# Altium PCB HumTemp_ESP32.PcbDoc
Units mm, origin at the board's own origin, x right, y up, seen from the top; angles counter-clockwise.
Board outline 66 x 92 mm, 2 copper layers (Top Layer, Bottom Layer); 12 components, 8 nets, 83 pads, 3 vias.
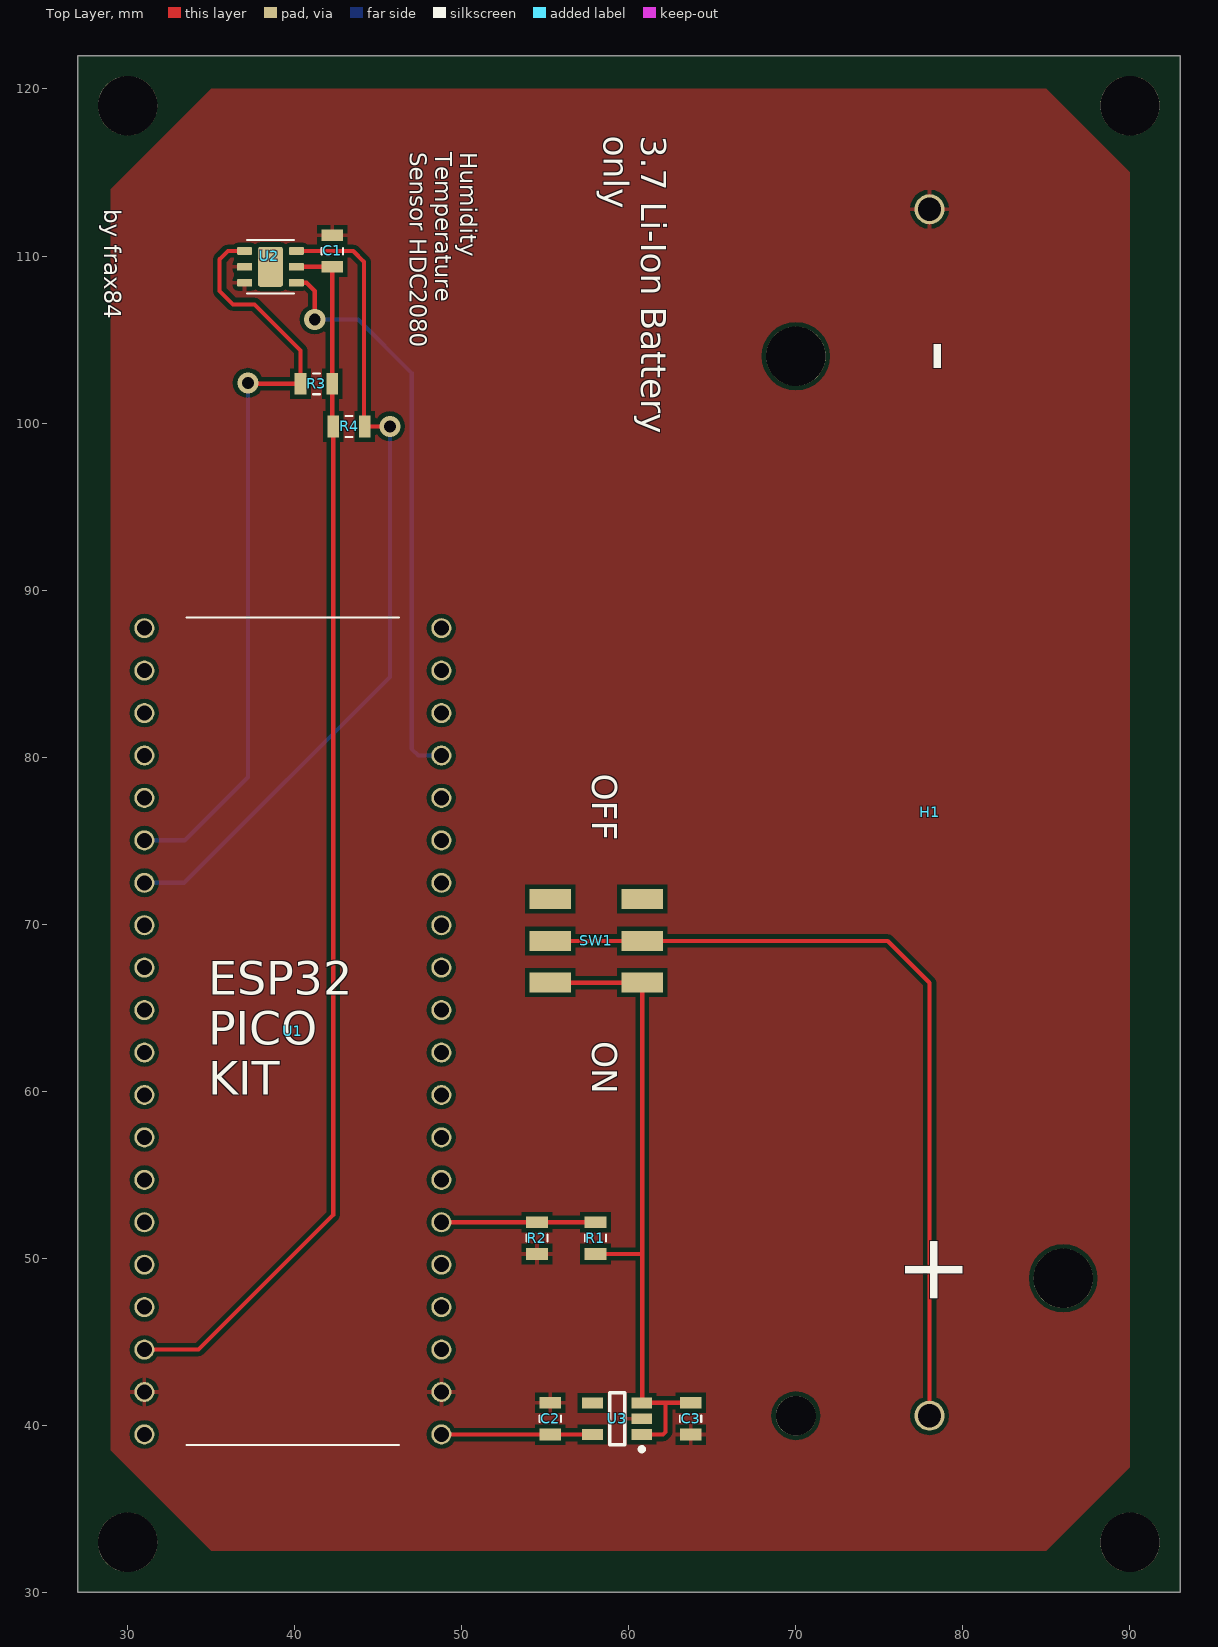
[diagram p0: Top Layer view]
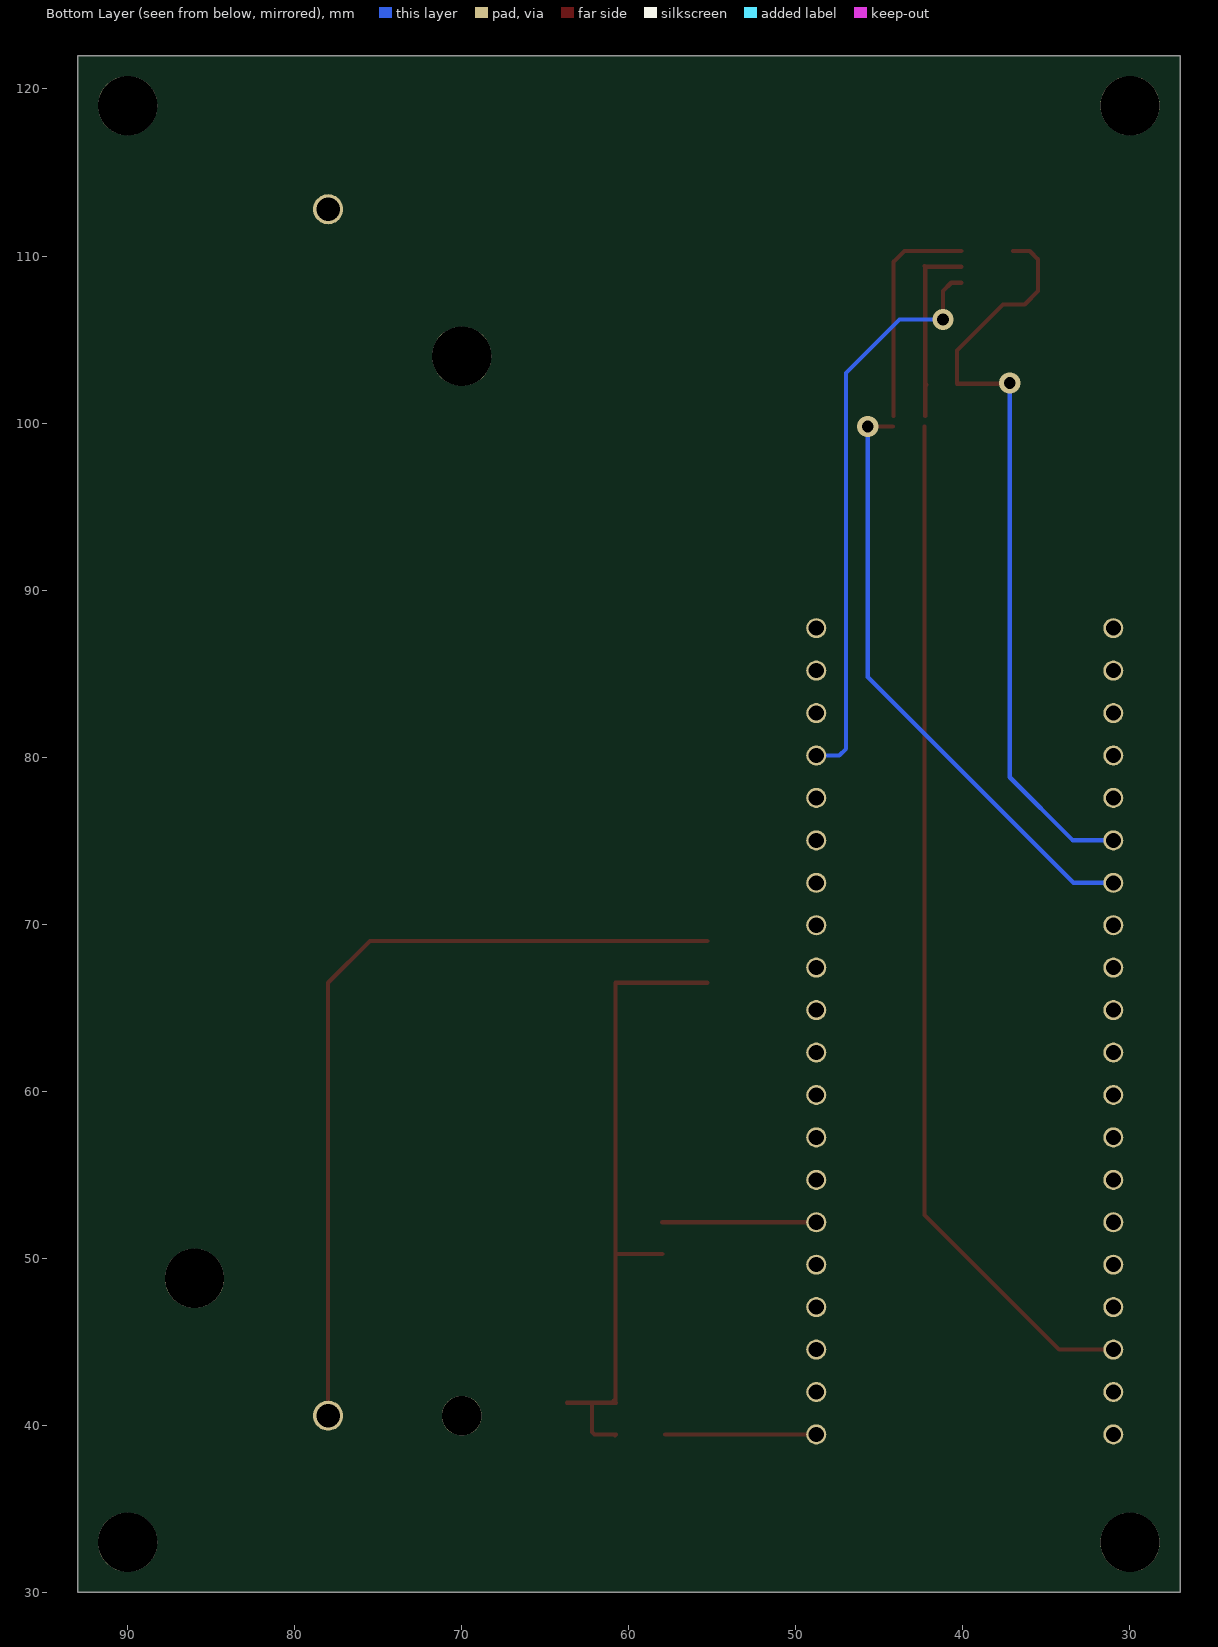
[diagram p1: Bottom Layer view, seen from below]
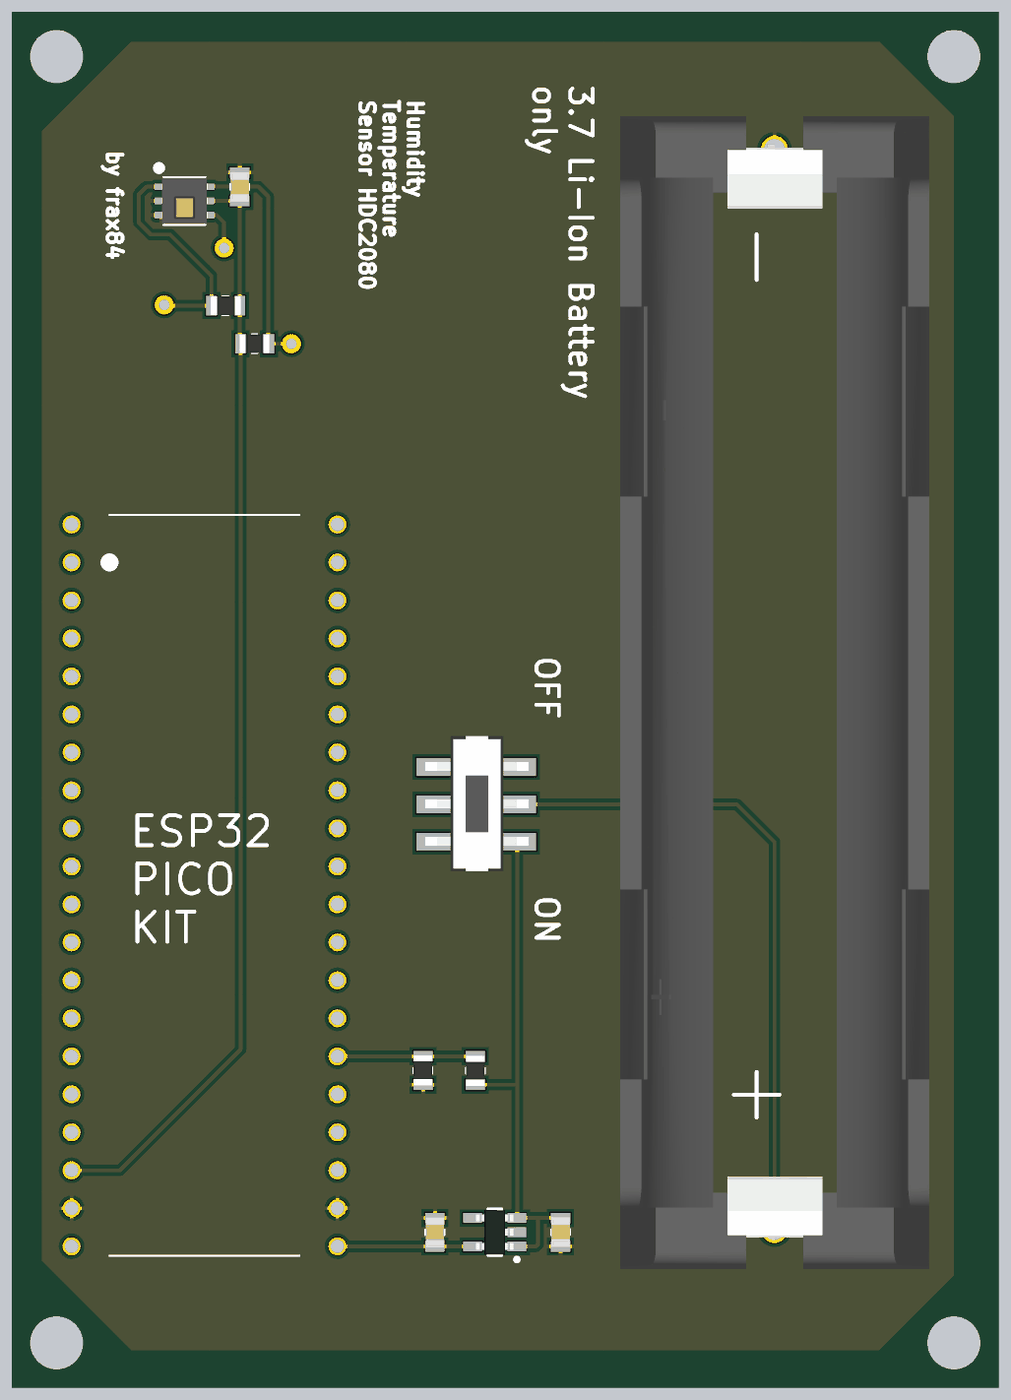
[diagram p2: 3D render of the assembled board from above, using the file's embedded part models]

## Layer stack, top to bottom
Top Solder: solder mask 0.0102, Solder Resist, Dk 3.5
Top Layer: signal copper 0.0356
Dielectric 1: dielectric 0.32, FR-4, Dk 4.8
Bottom Layer: signal copper 0.0356
Bottom Solder: solder mask 0.0102, Solder Resist, Dk 3.5

## Board outline
27,30 93,30 93,122 27,122

## Design rules (kind name [scope] priority, off if disabled: settings)
Clearance [All] p1: gap=0.254
HoleSize [All] p1: absolutevalues=TRUE maxlimit=5.08 minlimit=0.025 maxpercent=80.000 minpercent=20.000
MinimumSolderMaskSliver [All] p1: minsoldermaskwidth=0.127
PolygonConnect [All] p1: connectstyle=Relief reliefconductorwidth=0.254 reliefentries=4 polygonreliefangle="90 Angle" airgapwidth=0.254
RoutingVias [All] p1: holewidth=0.711 width=1.27 viastyle="Through Hole" minholewidth=0.711 minwidth=1.27 maxholewidth=0.711 maxwidth=1.27
SolderMaskExpansion [All] p1: expansion=0.102
Width [All] p1: maxlimit=0.254 minlimit=0.254 preferedwidth=0.254
28 further rules are at their usual default settings.

## Components (designator, comment, footprint, x,y, rotation, side; value= is the part's Value field where it differs from the comment)
C1 "SMD Capacitor" CAPCERAMIC_SMD_2012M_0805I 42.25,111.25 r270 top
C2 "SMD Capacitor" CAPCERAMIC_SMD_2012M_0805I 55.3,41.35 r270 top
C3 "SMD Capacitor" CAPCERAMIC_SMD_2012M_0805I 63.7,39.45 r90 top
H1 "18650 Battery holder - Keystone" 18650_BATTERYHOLDER 78,112.8 r270 top
R1 "SMD Resistor" RES_SMD_2012M-0805I 58,52.16 r270 top
R2 "SMD Resistor" RES_SMD_2012M-0805I 54.5,50.26 r90 top
R3 "SMD Resistor" RES_SMD_2012M-0805I 40.35,102.35 r0 top
R4 "SMD Resistor" RES_SMD_2012M-0805I 44.2,99.8 r180 top
SW1 "SwitchDPDT_JS202011SCQN" SWITCHDPDT 60.8,71.5 r270 top
U1 "ESP32-PICO-KIT" ESP32-PICO-KIT 31,87.72 r0 top
U2 "HDC2080" WSON6 37.15,110.35 r0 top
U3 "AP2112-3.3V" SOT95P285X110-5M 59.3,40.4 r180 top

## Footprints (in the part's own frame and the unit in brackets; to place one, negate y for a bottom-side part, rotate by r counter-clockwise, add the part's x,y. Pads: shape width x height; smd on the part's side, far side on the other; paste and mask are expansions set on the pad)
18650_BATTERYHOLDER [mm]
  round 1.8 hole 1.4 mask+0.07: 1(0,0) 2(72.22,0)
  round 3.55 hole 3.55 unplated paste+0 mask+0: ""(8.8,-8) ""(64,8)
  round 2.39 hole 2.39 unplated paste+0 mask+0: ""(72.22,-8)
  body extent -2.2,-10.3 74.85,10.35, height 14.86
CAPCERAMIC_SMD_2012M_0805I [mm] "2012 Metric - 0805 Imperial"
  rect 0.7x1.3 smd: 1(0,0) 2(1.9,0)
  silkscreen extent 0.76,-0.63 1.14,0.64, body extent -0.03,-0.62 1.97,0.63, height 0.59
ESP32-PICO-KIT [mm] "ESP32 Pico module development kit"
  round 1.2 hole 0.9 mask+0.07: 0(0,0) 1(0,-2.54) 2(0,-5.08) 4(0,-7.62) 5(0,-10.16) 6(0,-12.7) 7(0,-15.24) 8(0,-17.78) 9(0,-20.32) 10(0,-22.86) 11(0,-25.4) 12(0,-27.94) 13(0,-30.48) 14(0,-33.02) 15(0,-35.56) 16(0,-38.1) 17(0,-40.64) 18(0,-43.18) 19(0,-45.72) 20(0,-48.26) 21(17.78,0) 22(17.78,-2.54) 23(17.78,-5.08) 24(17.78,-7.62) 25(17.78,-10.16) 26(17.78,-12.7) 27(17.78,-15.24) 28(17.78,-17.78) 29(17.78,-20.32) 30(17.78,-22.86) 31(17.78,-25.4) 32(17.78,-27.94) 33(17.78,-30.48) 34(17.78,-33.02) 35(17.78,-35.56) 36(17.78,-38.1) 37(17.78,-40.64) 38(17.78,-43.18) 39(17.78,-45.72) 40(17.78,-48.26)
  round 1.2 on Top Overlay mask+0.07: ""(2.54,-2.54)
  silkscreen extent 2.54,-48.89 15.24,0.64
RES_SMD_2012M-0805I [mm] "2012 Metric - 0805 Imperial"
  rect 0.7x1.3 smd: 1(0,0) 2(1.9,0)
  silkscreen extent 0.75,-0.63 1.15,0.63, body extent -0.03,-0.62 1.97,0.63, height 0.6
SOT95P285X110-5M [mm] "SOT23, 5-Leads, Body 3,00x2,85mm, Pitch 0,95mm, IPC Low Density"
  rect 1.25x0.65 smd mask+0.07: 1(-1.475,0.95) 2(-1.475,0) 3(-1.475,-0.95)
  rect 1.25x0.65 smd: 4(1.475,-0.95) 5(1.475,0.95)
  silkscreen extent -1.6,-1.55 0.45,1.95, body extent -1.25,-1.5 1.25,1.5, height 1.07
SWITCHDPDT [mm]
  rect 1.2x2.5 smd: 0(0,0) 1(2.5,0) 2(5,0) 3(0,-5.5) 4(2.5,-5.5) 5(5,-5.5)
  body extent -2.06,-6.14 6.99,0.76, height 5.45
WSON6 [mm]
  rrect20% 0.9x0.45 smd mask+0.05: 1(-0.15,-0.05) 2(-0.15,-1) 3(-0.15,-1.95) 4(2.95,-1.95) 5(2.95,-1) 6(2.95,-0.05)
  round 0.8 on Top Overlay mask+0.07: 3(-0.3,1.2)
  rrect20% 1.5x2.4 smd mask+0.05: ""(1.4,-1)
  silkscreen extent 0,-2.6 2.8,0.6, body extent -0.15,-2.5 2.95,0.5

## Part data
C1 C2 C3: library part capceramic_SMD, "Ceramic SMD capacitor"
R1 R2 R3 R4: library part resistor_SMD
U2: "High precision humidity and temperature sensor"
U3: "AP2112 - 3.3V voltage regulator"

## Free pads (board coordinates)
  round 3.55 hole 3.55 unplated paste+0 mask+0: 0(30,119) 1(90,119) 2(90,33) ""(30,33)

## Via types
v1: diameter 1.27, hole 0.711, Top Layer to Bottom Layer, 3 vias

## Nets (pads, with @x,y where several pads share a name; then routed paths per layer and width w, separated by ;. In a path a pad name is that pad's centre, name@x,y a point inside that pad or via, vN(x,y) a via of type N, cw(c..) or ccw(c..) an arc to the next point about the centre after c; other vN are vias at no path point)
GND: C1.1 C2.1 C3.1 H1.1 R2.1 U1.19 U1.39 U2.2 U2.3@37,108.4 U3.2
INT: U1.24 U2.4 | length 34.6
  Top Layer w0.254: U2.4 40.7,108.4 41.2,107.9 v1(41.2,106.2)
  Bottom Layer w0.254: v1(41.2,106.2) 43.8,106.2 47,103 47,80.5 47.4,80.1 U1.24
SCL: R4.1 U1.7 U2.6 | length 49.8
  Top Layer w0.254: U2.6 43.5,110.3 44.15,109.65 R4.1@44.15,100.425 ; R4.1 v1(45.7,99.8)
  Bottom Layer w0.254: U1.7 33.38,72.48 45.7,84.8 v1(45.7,99.8)
SDA: R3.1 U1.6 U2.1 | length 46.5
  Top Layer w0.254: U2.1 36,110.3 35.5,109.8 35.5,107.9 36.3,107.1 37.6,107.1 40.35,104.35 R3.1 37.25,102.35 v1(37.2,102.4)
  Bottom Layer w0.254: U1.6 33.42,75.02 37.2,78.8 v1(37.2,102.4)
SWITCH_VDD: H1.2 SW1.1 SW1.4 | length 49.7
  Top Layer w0.254: SW1.4 SW1.1 75.5,69 78,66.5 H1.2
VBATT: C3.2 R1.2 SW1.2 SW1.5 U3.1 U3.3 | length 39.8
  Top Layer w0.254: SW1.5 SW1.2 60.8,50.3 ; R1.2 60.76,50.26 60.8,50.3 ; U3.3@60.8,41.475 60.8,50.3 ; U3.1@60.825,39.4 U3.1 62.05,39.45 62.2,39.6 62.2,41.312 62.238,41.35 ; U3.3@60.9,41.475 U3.3 62.238,41.35 ; C3.2 62.238,41.35
VDD3.3: C1.2 C2.2 R3.2 R4.2 U1.18 U1.40 U2.5 U3.5 | length 82.1
  Top Layer w0.254: U1.18 34.24,44.54 42.3,52.6 R4.2 ; U2.5 C1.2 ; R3.2@42.2,102.3 R3.2 ; R4.2@42.25,100.425 R3.2 ; C1.2@42.3,109.4 C1.2 ; U1.40 48.79,39.45 C2.2 U3.5 ; R3.2 C1.2
VTEST: R1.1 R2.2 U1.35 | length 9.2
  Top Layer w0.254: U1.35 R2.2 R1.1
pads on no net: H1. SW1.0 SW1.3 U1. U1.0 U1.1 U1.2 U1.4 U1.5 U1.8 U1.9 U1.10 U1.11 U1.12 U1.13 U1.14 U1.15 U1.16 U1.17 U1.20 U1.21 U1.22 U1.23 U1.25 U1.26 U1.27 U1.28 U1.29 U1.30 U1.31 U1.32 U1.33 U1.34 U1.36 U1.37 U1.38 U2. U2.3@36.85,111.55 U3.4

## Polygon pours and split planes (outlines as drawn)
GND on Top Layer "GND" (solid, remove dead copper, pour order 2): 35,120 85,120 90,115 90,37.5 85,32.5 35,32.5 29,38.5 29,114 35,120

## Silkscreen, mask and mechanical layers (free items; w line width, h text height)
Top Overlay:
  text "3.7 Li-Ion Battery  / only" at 58.5,117.2 h1.5 r270
  text "Humidity / Temperature / Sensor HDC2080" at 46.9,116.2 h1 r270
  text "by frax84" at 28.6,112.8 h1 r270
  text "-" at 80,103 h4 r90
  text "OFF" at 57.8,79 h1.5 r270
  text "ON" at 57.8,63 h1.5 r270
  text "+" at 80,47 h4 r90
Mechanical 13:
  lines w0.127: 50.5,0 51.5,0 ; 27,30 27,122 93,122 93,30 27,30

## Text inside footprints (layer, text, board x,y; h text height)
U1: Top Overlay "ESP32 / PICO / KIT" at 34.81,59.78 h2